# Altium PCB board.PcbDoc
Units mil, origin at the board's own origin, x right, y up, seen from the top; angles counter-clockwise.
Board outline 1533 x 1467.5 mil, 2 copper layers (Top Layer, Bottom Layer); 21 components, 22 nets, 105 pads, 20 vias.
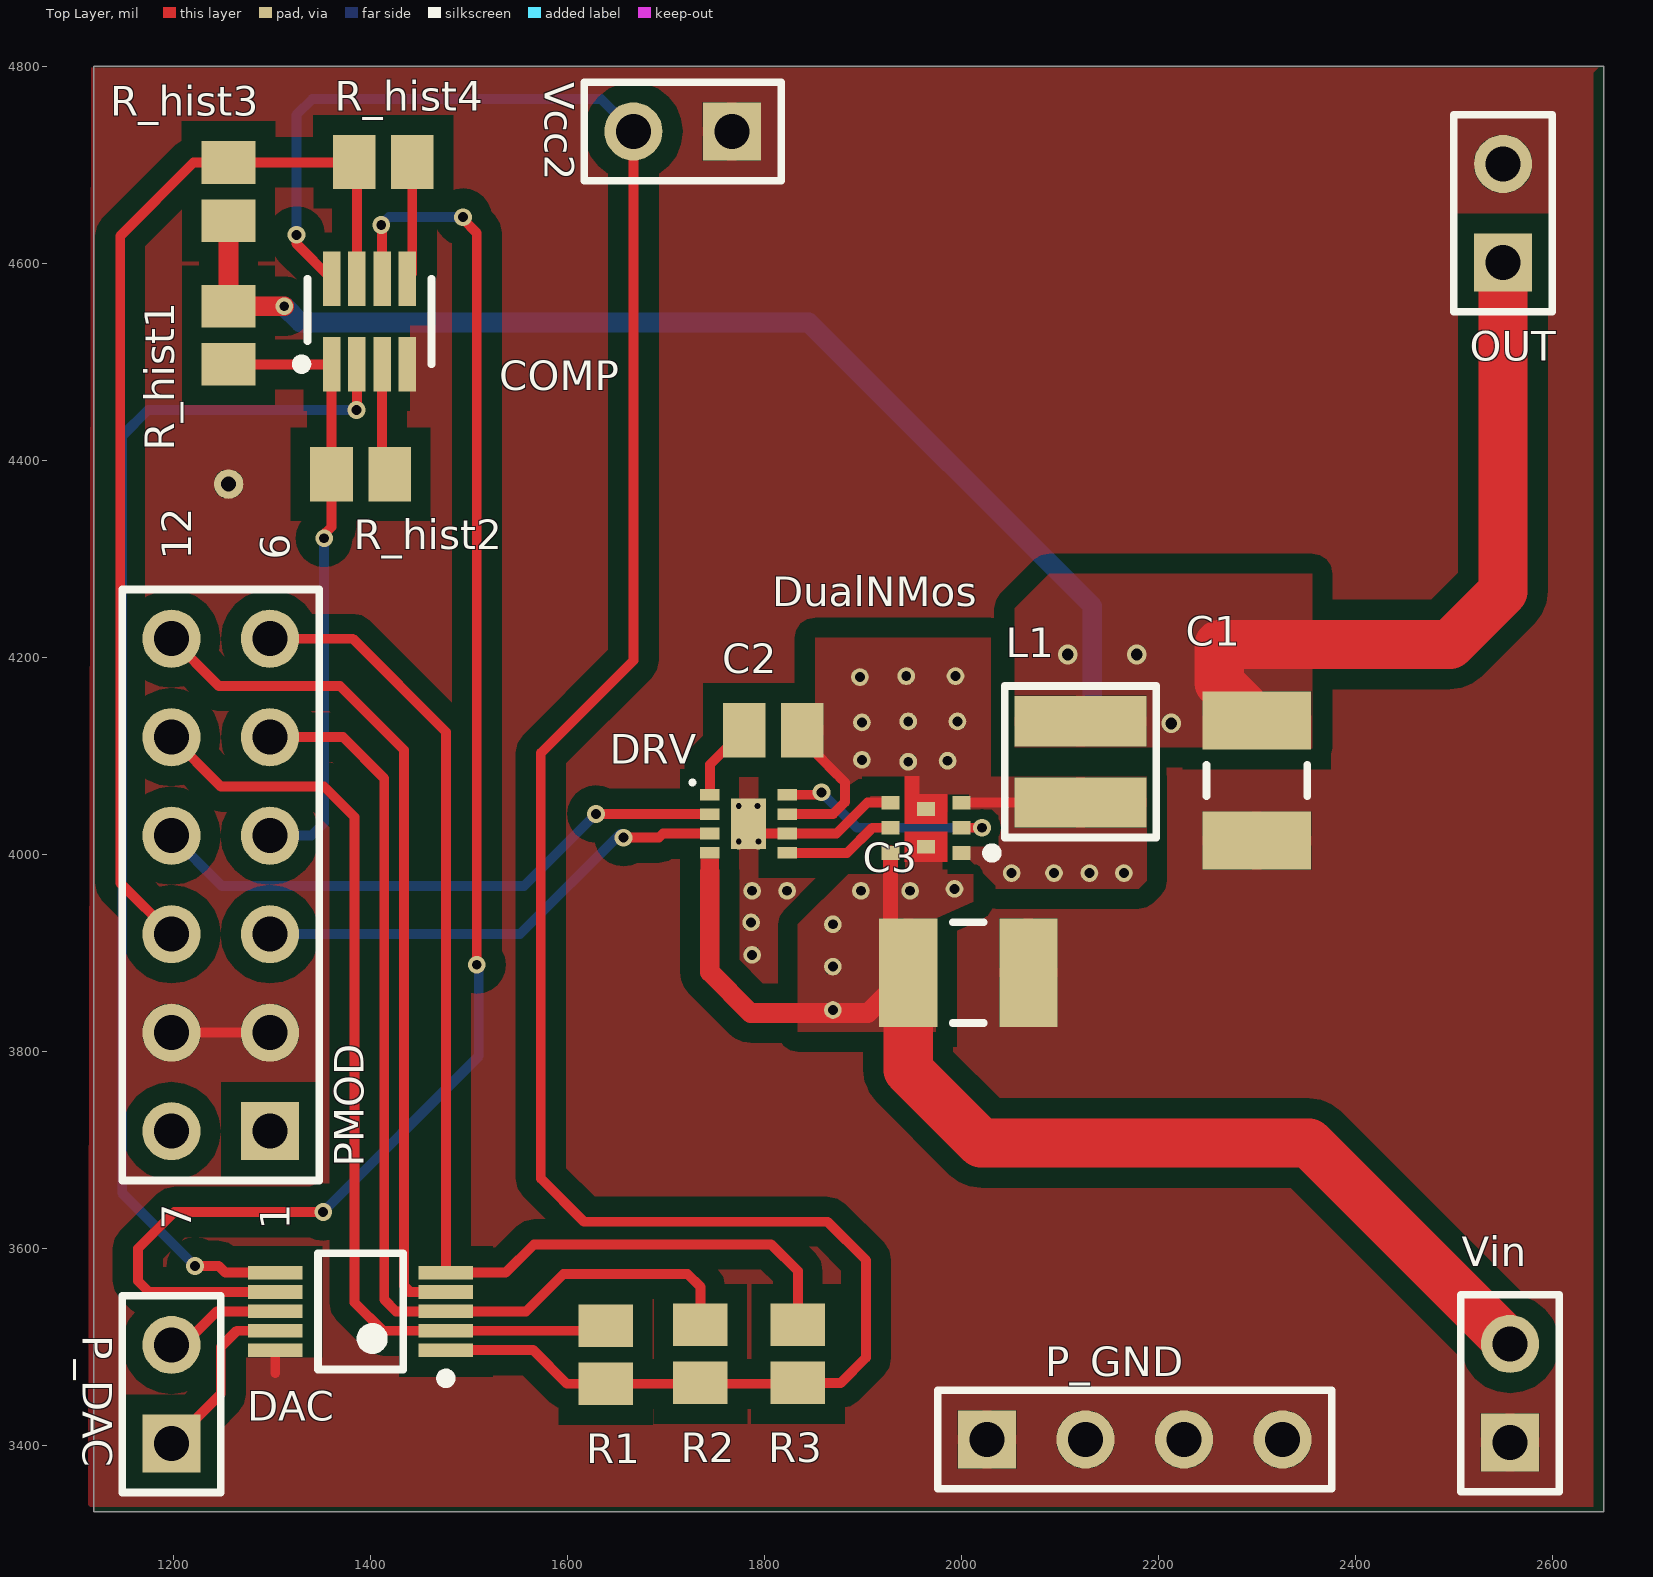
[diagram p0: Top Layer view]
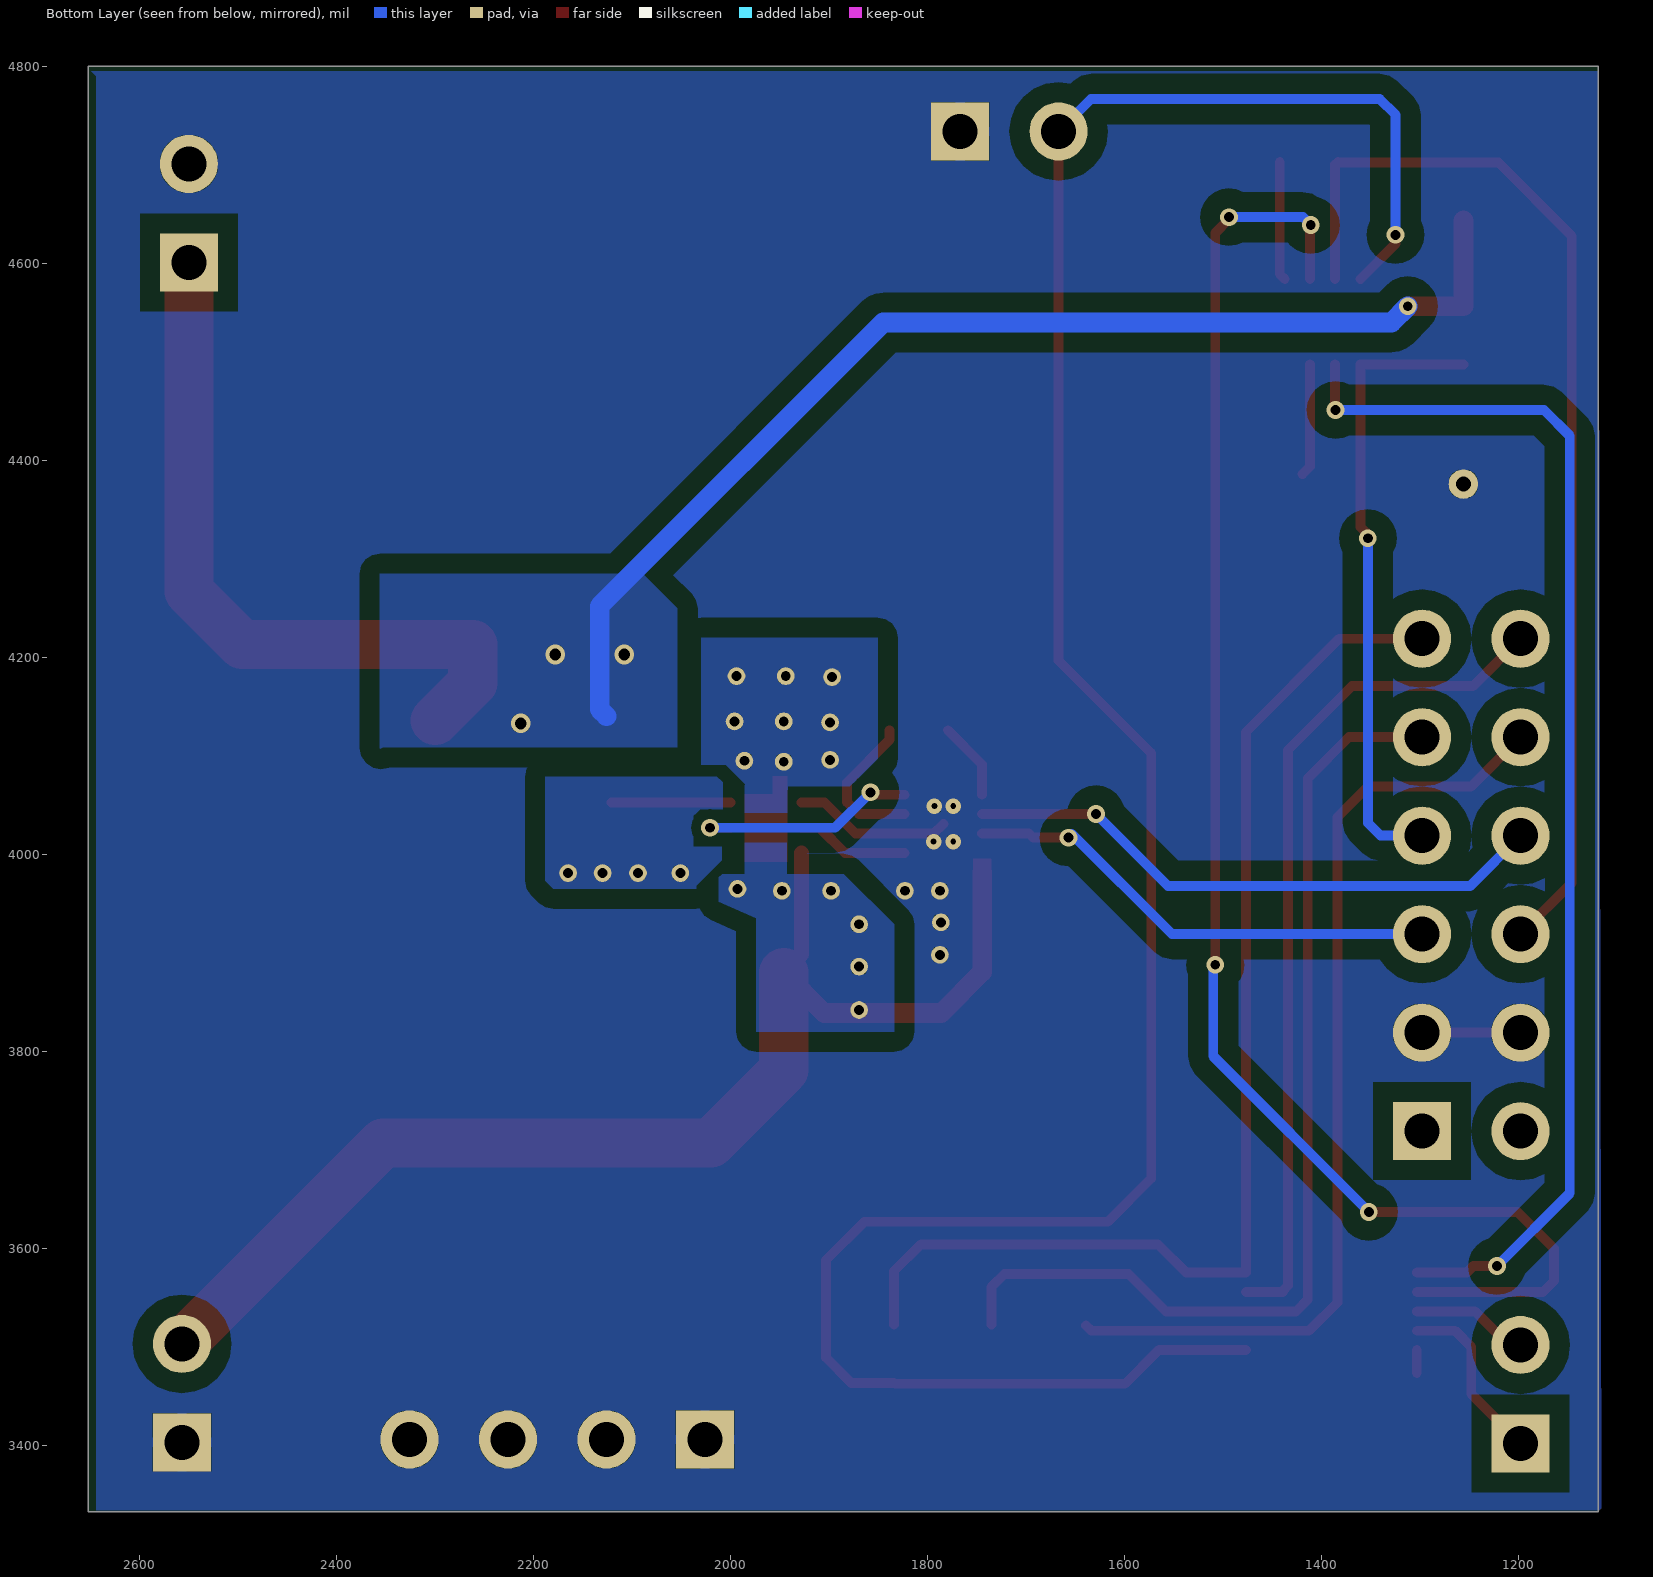
[diagram p1: Bottom Layer view, seen from below]

## Layer stack, top to bottom
Top Solder: solder mask 0.4, Solder Resist, Dk 3.5
Top Layer: signal copper 1.4
Dielectric 1: dielectric 12.6, FR-4, Dk 4.8
Bottom Layer: signal copper 1.4
Bottom Solder: solder mask 0.4, Solder Resist, Dk 3.5

## Board outline
1119,3332.5 2652,3332.5 2652,4800 1119,4800

## Design rules (kind name [scope] priority, off if disabled: settings)
Clearance Clearance_1 [InNet('GND')] p1: gap=20 except(30: SMDPad-SMDPad)
Clearance [All] p2: gap=10
PolygonConnect PolygonConnect_4 [InNet('GND')] p1: connectstyle=Relief reliefconductorwidth=10 reliefentries=4 polygonreliefangle="90 Angle" airgapwidth=0
PolygonConnect PolygonConnect_3 [InNet('JONC')] p2: connectstyle=Relief reliefconductorwidth=10 reliefentries=4 polygonreliefangle="90 Angle" airgapwidth=0
PolygonConnect PolygonConnect_2 [InNet('VOUT')] p3: connectstyle=Relief reliefconductorwidth=10 reliefentries=4 polygonreliefangle="90 Angle" airgapwidth=0
PolygonConnect PolygonConnect_1 [InNet('VCC')] p4: connectstyle=Relief reliefconductorwidth=10 reliefentries=4 polygonreliefangle="90 Angle" airgapwidth=0
PolygonConnect [All] p5: connectstyle=Relief reliefconductorwidth=10 reliefentries=4 polygonreliefangle="90 Angle" airgapwidth=15
RoomDefinition Sheet1 [InComponentClass('Sheet1')] p1: confinementstyle=ConfineIn formatcopy=TRUE lockcomponents=FALSE outline 0,0 2000,0 2000,1000 0,1000
RoutingVias [All] p1: holewidth=10 width=18 viastyle="Through Hole" minholewidth=10 minwidth=18 maxholewidth=10 maxwidth=18
SolderMaskExpansion [All] p1: expansion=4
Width Width_2 [InNet('VCC')] p1: maxlimit=20 minlimit=10 preferedwidth=20
Width Width_1 [InNet('VOUT')] p2: maxlimit=50 minlimit=10 preferedwidth=50
Width [All] p3: maxlimit=10 minlimit=10 preferedwidth=10
30 further rules are at their usual default settings.

## Components (designator, comment, footprint, x,y, rotation, side; value= is the part's Value field where it differs from the comment)
C1 "Cap" C1210_M 2300,4075 r90 top
C2 "Cap" C0805 1809,4126 r180 top
C3 "Cap" C1210_M 2007,3880 r0 top
COMP "MAX9107" SOT23-8 1399,4541 r0 top
DAC "MCP4728" TSSOP50P500X110-10N 1390,3536 r180 top
DRV "NCP81151B" QFN50P200X200X80_HS-9N 1784,4031 r0 top
DualNMos "NTLUD4C26N" ONSC-UDFN-6-517BF_V 1964,4027 r180 top
L1 "74438336022" WE-MAPI_3020 2121,4094 r90 top
OUT "Header 2" HDR1X2 2550,4601 r90 top
P_DAC "Header 2" HDR1X2 1198,3402 r90 top
P_GND "Header 4" HDR1X4 2026,3406 r0 top
PMOD "Header 6X2A" HDR2X6_CEN 1298,3719 r90 top
R1 "Res1" C0805 1639,3492 r270 top
R2 "Res1" C0805 1735,3493 r270 top
R3 "Res1" C0805 1834,3493 r270 top
R_hist1 "Res1" C0805 1256,4527 r90 top
R_hist2 "Res1" C0805 1390,4386 r180 top
R_hist3 "Res1" C0805 1256,4673 r90 top
R_hist4 "Res1" C0805 1413,4703 r0 top
Vcc2 "Header 2" HDR1X2 1767,4734 r180 top
Vin "Header 2" HDR1X2 2557,3403 r90 top

## Footprints (in the part's own frame and the unit in brackets; to place one, negate y for a bottom-side part, rotate by r counter-clockwise, add the part's x,y. Pads: shape width x height; smd on the part's side, far side on the other; paste and mask are expansions set on the pad)
C0805 [mm] "Chip Capacitor, Body 2.0x1.3mm, IPC High Density"
  rect 1.1x1.4 smd: 1(-0.75,0) 2(0.75,0)
  body extent -1.1,-0.72 1.1,0.72, height 1.4
C1210_M [mm] "Chip Capacitor, Body 3.2x2.5mm, IPC Low Density"
  rect 1.5x2.8 smd: 1(-1.55,0) 2(1.55,0)
  silkscreen extent -0.4,-1.3 0.4,1.3, body extent -1.7,-1.35 1.7,1.35, height 1.5
HDR1X2 [mm] "Connector; Header; 2 Position"
  rect 1.5x1.5 hole 0.9: 1(0,0)
  round 1.5 hole 0.9: 2(2.54,0)
  silkscreen extent -1.27,-1.27 3.81,1.27
HDR1X4 [mm] "Connector; Header; 4 Position"
  rect 1.5x1.5 hole 0.9: 1(0,0)
  round 1.5 hole 0.9: 2(2.54,0) 3(5.08,0) 4(7.62,0)
  silkscreen extent -1.27,-1.27 8.89,1.27
HDR2X6_CEN [mm] "Connector; Header; 6x2 Position"
  rect 1.5x1.5 hole 0.9: 1(0,0)
  round 1.5 hole 0.9: 2(2.54,0) 3(5.08,0) 4(7.62,0) 5(10.16,0) 6(12.7,0) 7(0,2.54) 8(2.54,2.54) 9(5.08,2.54) 10(7.62,2.54) 11(10.16,2.54) 12(12.7,2.54)
  silkscreen extent -1.27,-1.27 13.97,3.81
ONSC-UDFN-6-517BF_V [mm] "SON, 6-Leads, Body 2x2mm, Pitch 0.65mm"
  rect 0.47x0.35 smd: 1(-0.915,0.65) 2(-0.915,0) 3(-0.915,-0.65) 4(0.915,-0.65) 5(0.915,0) 6(0.915,0.65)
  rect 0.47x0.35 smd paste+0 mask+0: 7(0,0.485) 8(0,-0.485)
  Top Layer region: -0.55,-0.87 -0.55,-0.1 0.55,-0.1 0.55,-0.87
  Top Layer region: -0.55,0.1 -0.55,0.87 0.55,0.87 0.55,0.1
  silkscreen extent -1.83,0.53 -1.58,0.77, body extent -1,-1 1,1, height 0.55
QFN50P200X200X80_HS-9N [mm] "QFN, 8-Leads, Body 2.00x2.00mm, Pitch 0.50mm, Thermal Pad 1.80x1.80mm, IPC Medium Density"
  rect 0.5x0.3 smd: 1(-1,0.75) 2(-1,0.25) 3(-1,-0.25) 4(-1,-0.75) 5(1,-0.75) 6(1,-0.25) 7(1,0.25) 8(1,0.75)
  rect 0.9x1.3 smd: 9(0,0)
  silkscreen extent -1.5,1.02 -1.4,1.12, body extent -1,-1 1,1, height 0.8
SOT23-8 [mm] "SSOP; 8 Leads; Body Width 1.6 mm; Pitch 0.65 mm"
  rect 0.45x1.4 smd: 1(-0.975,-1.1) 2(-0.325,-1.1) 3(0.325,-1.1) 4(0.975,-1.1) 5(0.975,1.1) 6(0.325,1.1) 7(-0.325,1.1) 8(-0.975,1.1)
  silkscreen extent -1.87,-1.22 1.6,1.1
TSSOP50P500X110-10N [mm] "TSSOP, 10-Leads, Body 3.00x3.00mm, Pitch 0.50mm, IPC Medium Density"
  rect 1.4x0.35 smd: 1(-2.2,1) 2(-2.2,0.5) 3(-2.2,0) 4(-2.2,-0.5) 5(-2.2,-1) 6(2.2,-1) 7(2.2,-0.5) 8(2.2,0) 9(2.2,0.5) 10(2.2,1)
  silkscreen extent -2.33,-1.5 1.1,1.85, body extent -1.5,-1.5 1.5,1.5, height 1.1
WE-MAPI_3020 [mm] "SMD Shielded Power Inductor, 2-Leads, body 3.0x3.0"
  rect 1.3x3.4 smd: 1(-1.05,0) 2(1.05,0)
  silkscreen extent -1.95,-1.95 1.95,1.95, body extent -1.5,-1.5 1.5,1.5, height 2.01

## Part data
C1 C2 C3: "Capacitor"
L1: "WE-MAPI SMD Shielded Power Inductor, size 3020, 2.2 uH"
OUT P_DAC Vcc2 Vin: "Header, 2-Pin"
P_GND: "Header, 4-Pin"
PMOD: "Header, 6-Pin, Dual row"
R1 R2 R3 R_hist1 R_hist2 R_hist3 R_hist4: "Resistor"

## Free pads (board coordinates)
  round 18 hole 10: 5(1786.52,3931) 5(1787.52,3898) 5(1787.52,3963) 5(1823.03,3963) 5(1869.52,3842) 5(1869.52,3886) 5(1869.52,3929) 5(1897,4180) 5(1898,3963) 5(1899,4096) 5(1899,4134) 5(1944,4181) 5(1946,4094) 5(1946,4135) 5(1948,3963) 5(1986,4095) 5(1993,3965) 5(1994,4181) 5(1996,4135) 5(2051,3981) 5(2094,3981) 5(2130,3981) 5(2165,3981)
  round 30 hole 15: 6(1256,4376)

## Via types
v1: diameter 18, hole 10, Top Layer to Bottom Layer, 13 vias
v2: diameter 15.75, hole 5.91, Top Layer to Bottom Layer, 4 vias
v3: diameter 20, hole 12, Top Layer to Bottom Layer, 3 vias

## Nets (pads, with @x,y where several pads share a name; then routed paths per layer and width w, separated by ;. In a path a pad name is that pad's centre, name@x,y a point inside that pad or via, vN(x,y) a via of type N, cw(c..) or ccw(c..) an arc to the next point about the centre after c; other vN are vias at no path point)
CTRL1: DRV.8 DualNMos.2 | length 234.5
  Top Layer w10: DRV.8 1855.53,4060.53 v1(1858,4063) ; DualNMos.2 v1(2021,4027)
  Bottom Layer w10: v1(1858,4063) 1894,4027 v1(2021,4027)
CTRL2: DRV.5 DualNMos.5 | length 115.2
  Top Layer w10: DRV.5 1883.92,4001.47 1909.45,4027 DualNMos.5
EN: DRV.3 PMOD.3 | length 492.8
  Top Layer w10: v1(1657,4017) 1693,4017 1697.16,4021.16 DRV.3
  Bottom Layer w10: PMOD.3 1552,3919 1654,4021 1657,4018 v1(1657,4017)
FB: COMP.1 PMOD.4 R_hist1.1 R_hist2.2 | length 635.6
  Top Layer w10: R_hist1.1 1360.39,4497.47 COMP.1 1360.61,4386.14 R_hist2.2 1360.47,4332.47 1351,4323 v1(1353,4321)
  Bottom Layer w10: PMOD.4 1340,4019 1353,4032 v1(1353,4321)
FB2: COMP.7 PMOD.9 R_hist3.2 R_hist4.1 | length 1118.9
  Top Layer w10: PMOD.9 1146,3971 1146,4628 1220.53,4702.53 R_hist3.2 1383,4702.53 R_hist4.1 1386.2,4700.27 COMP.7
GND: C1.1 C3.2 COMP.4 DAC.10 DRV.6 DRV.9 DualNMos.4 OUT.2 P_GND.1 P_GND.2 P_GND.3 P_GND.4 pad.5@1786.52,3931 pad.5@1787.52,3898 pad.5@1787.52,3963 pad.5@1823.03,3963 pad.6 PMOD.2 PMOD.8 Vcc2.1 Vin.1 | length 284.3
  Top Layer w10: PMOD.8 PMOD.2 ; 1303.39,3473.39 DAC.10 ; DRV.9 1793.84,4021.16 DRV.6 1873.16,4021.16 1904.59,4052.59 DualNMos.4
  other v2: 1774,4013 1794,4013 1774,4049 1793,4049
JONC: C2.1 DRV.7 DualNMos.1 DualNMos.3 DualNMos.8 L1.1 pad.5@1897,4180 pad.5@1899,4096 pad.5@1899,4134 pad.5@1944,4181 pad.5@1946,4094 pad.5@1946,4135 pad.5@1986,4095 pad.5@1994,4181 pad.5@1996,4135 pad.5@2051,3981 pad.5@2094,3981 pad.5@2130,3981 pad.5@2165,3981 | length 275.7
  Top Layer w10: DRV.7 1869.84,4040.84 1882,4053 1882,4072.94 1838.53,4116.41 C2.1 ; DualNMos.3 2120.93,4052.59 L1.1
LDAC: DAC.4 PMOD.12 | length 872.6
  Top Layer w10: PMOD.12 1246,4171 1369,4171 1434.06,4105.94 1434.06,3562.27 1439.32,3557.01 1439.32,3555.68 DAC.4
NetC2_2: C2.2 DRV.1 | length 79.9
  Top Layer w10: DRV.1 1744.63,4091.16 C2.2
NetCOMP_3: COMP.3 R_hist2.1 | length 114.9
  Top Layer w10: COMP.3 1411.8,4393.73 R_hist2.1
NetCOMP_5: COMP.5 R_hist4.2 | length 120.8
  Top Layer w10: COMP.5 1442.53,4589.45 R_hist4.2
NetDAC_8: DAC.8 P_DAC.2 | length 104.6
  Top Layer w10: P_DAC.2@1212,3504 1244,3536 DAC.8
NetDAC_9: DAC.9 P_DAC.1 | length 180.9
  Top Layer w10: P_DAC.1 1248,3452 1248,3500 1264.31,3516.31 DAC.9
PWM: DRV.2 PMOD.10 | length 597.8
  Top Layer w10: v1(1629,4041) 1727.2,4041 ; 1727.35,4040.84 DRV.2
  Bottom Layer w10: PMOD.10 1249,3968 1556,3968 v1(1629,4041)
RDY: DAC.5 PMOD.6 R3.1 | length 1199.5
  Top Layer w10: PMOD.6 1382,4219 1476.61,4124.39 DAC.5@1476.61,3577.57 ; DAC.5 1537.37,3575.37 1566,3604 1807,3604 1834,3577 R3.1
SCL: DAC.2 PMOD.11 R1.1 | length 981.6
  Top Layer w10: PMOD.11 1248,4069 1353,4069 1384,4038 1384,3545 1412.69,3516.31 DAC.2 1633.79,3516.31 R1.1
SDA: DAC.3 PMOD.5 R2.1 | length 1048
  Top Layer w10: PMOD.5 1372,4119 1414.06,4076.94 1414.06,3547.94 1426,3536 DAC.3 1558,3536 1596,3574 1722,3574 1735,3561 R2.1
VCC: C3.1 DRV.4 DualNMos.6 DualNMos.7 pad.5@1869.52,3842 pad.5@1869.52,3886 pad.5@1869.52,3929 pad.5@1898,3963 pad.5@1948,3963 pad.5@1993,3965 Vin.2 | length 1291.8
  Top Layer w15: DualNMos.6 1927.98,3898 C3.1
  Top Layer w20: 1744.63,3982.63 1744.63,3880.37 1786,3839 1904.98,3839 C3.1
  Top Layer w50: C3.1 1945.98,3781.02 2020,3707 2353,3707 Vin.2
VCC2: COMP.8 DAC.1 R1.2 R2.2 R3.2 Vcc2.2 | length 2560.6
  Top Layer w10: v1(1325,4629) 1325,4619.92 COMP.8 ; DAC.1 1565.37,3496.63 1599.53,3462.47 R1.2 1833,3462.47 R3.2 1877.47,3463.47 1903,3489 1903,3588 1864,3627 1617,3627 1573,3671 1573,4103 1667,4197 Vcc2.2
  Bottom Layer w10: v1(1325,4629) 1325,4751 1341,4767 1634,4767 Vcc2.2
VOUT: C1.2 L1.2 OUT.1 R_hist1.2 R_hist3.1 | length 1942.2
  Top Layer w20: R_hist3.1 R_hist1.2 v1(1312.47,4556.53)
  Top Layer w50: C1.2 2261.69,4174.34 2261.69,4213 2496,4213 2550,4267 OUT.1
  Bottom Layer w20: v1(1312.47,4556.53) 1329,4540 1845,4540 2133,4252 2133,4147.34 2126,4140.34
  other v3: 2213,4133 2108,4203 2178,4203
VREF: COMP.2 DAC.6 | length 1253.3
  Top Layer w10: v1(1222,3582) 1246,3582 1252.63,3575.37 DAC.6 ; v1(1385.8,4451.2) 1386.2,4451.2 COMP.2
  Bottom Layer w10: v1(1222,3582) 1148,3656 1148,4425 1174.2,4451.2 v1(1385.8,4451.2)
VREF2: COMP.6 DAC.7 | length 1605
  Top Layer w10: DAC.7 1175.32,3555.68 1164,3567 1164,3600 1201,3637 v1(1352,3637) ; v1(1411,4639) 1411.8,4638.2 COMP.6 ; v1(1494,4647) 1494,4645 1508,4631 v1(1508,3888)
  Bottom Layer w10: v1(1352,3637) 1510,3795 1510,3888 v1(1508,3888) ; v1(1411,4639) 1419,4647 v1(1494,4647)
pads on no net: PMOD.1 PMOD.7

## Polygon pours and split planes (outlines as drawn)
GND on Top Layer "Top Layer-No Net" (solid, pour order 56): 1116.69,4798.46 2646.69,4798.46 2641.69,4793.46 2641.69,3337.46 1115.69,3337.46 1113.69,3339.46
JONC on Top Layer "Top Layer-No Net" (solid, pour order 54): 2009,3994 2035,3968 2035,3965 2180,3965 2188,3973 2188,4079 2014,4079 2009,4074 2008,4073 2008,4046 2031,4046 2035,4042 2038,4039 2038,4010 2038,4008 2009,4008
VOUT on Top Layer "Top Layer-No Net" (solid, pour order 46): 2054,4109 2353,4109 2355,4107 2356,4108 2356,4285 2089,4285 2055,4251 2054,4250 2054,4110
JONC on Top Layer "Top Layer-No Net" (solid, pour order 40): 1942.35,4030.94 1942.35,4061.25 1942,4069 1879,4069 1851.43,4096.57 1851.43,4220 2030,4220 2030,4075.28 2019,4061.25 2010.17,4061.25 1985.65,4061.25 1985.65,4030.94
VCC on Top Layer "Top Layer-No Net" (solid, pour order 38): 1985.65,4023.06 1985.65,3992.75 1985.65,3980.35 2012,3980 2012,3952 1974,3935 1974,3820 1834,3820 1834,3929 1885,3980 1943,3980 1943,3992.09 1942.35,3992.75 1985.65,3992.75
GND on Bottom Layer "Top Layer-No Net" (solid, pour order 58): 1119,4795 2649,4795 2644,4790 2644,3334 1118,3334 1116,3336
JONC on Bottom Layer "Top Layer-No Net" (solid, pour order 34): 2009,3994 2035,3968 2035,3965 2180,3965 2188,3973 2188,4079 2014,4079 2009,4074 2008,4073 2008,4046 2031,4046 2035,4042 2038,4039 2038,4010 2038,4008 2009,4008
VOUT on Bottom Layer "Top Layer-No Net" (solid, pour order 48): 2054,4109 2353,4109 2355,4107 2356,4108 2356,4285 2089,4285 2055,4251 2054,4250 2054,4110
JONC on Bottom Layer "Top Layer-No Net" (solid, pour order 44): 1942.35,4035 1942.35,4061.25 1942,4069 1879,4069 1850.77,4097.23 1850.77,4220 2030,4220 2030,4091 2005,4091 1985,4071 1985.65,4070.35 1985.65,4035
VCC on Bottom Layer "Top Layer-No Net" (solid, pour order 42): 1985.65,4019.01 1985.65,3992.75 1985.65,3980.35 2012,3980 2012,3952 1974,3935 1974,3820 1834,3820 1834,3929 1885,3980 1943,3980 1943,3992.09 1943,4018.95

## Other copper
Top Layer:
  rectangle net VCC: 1735,3984 1754,3996
  rectangle net JONC: 1942.35,4061.25 1957.23,4079.48

## Text inside footprints (layer, text, board x,y; h text height)
PMOD: Top Overlay "7" at 1218,3619 h30 r90; Top Overlay "1" at 1318,3619 h30 r90; Top Overlay "6" at 1318,4299 h30 r90; Top Overlay "12" at 1218,4299 h30 r90